# EAGLE board main (EAGLE 8.7.0)
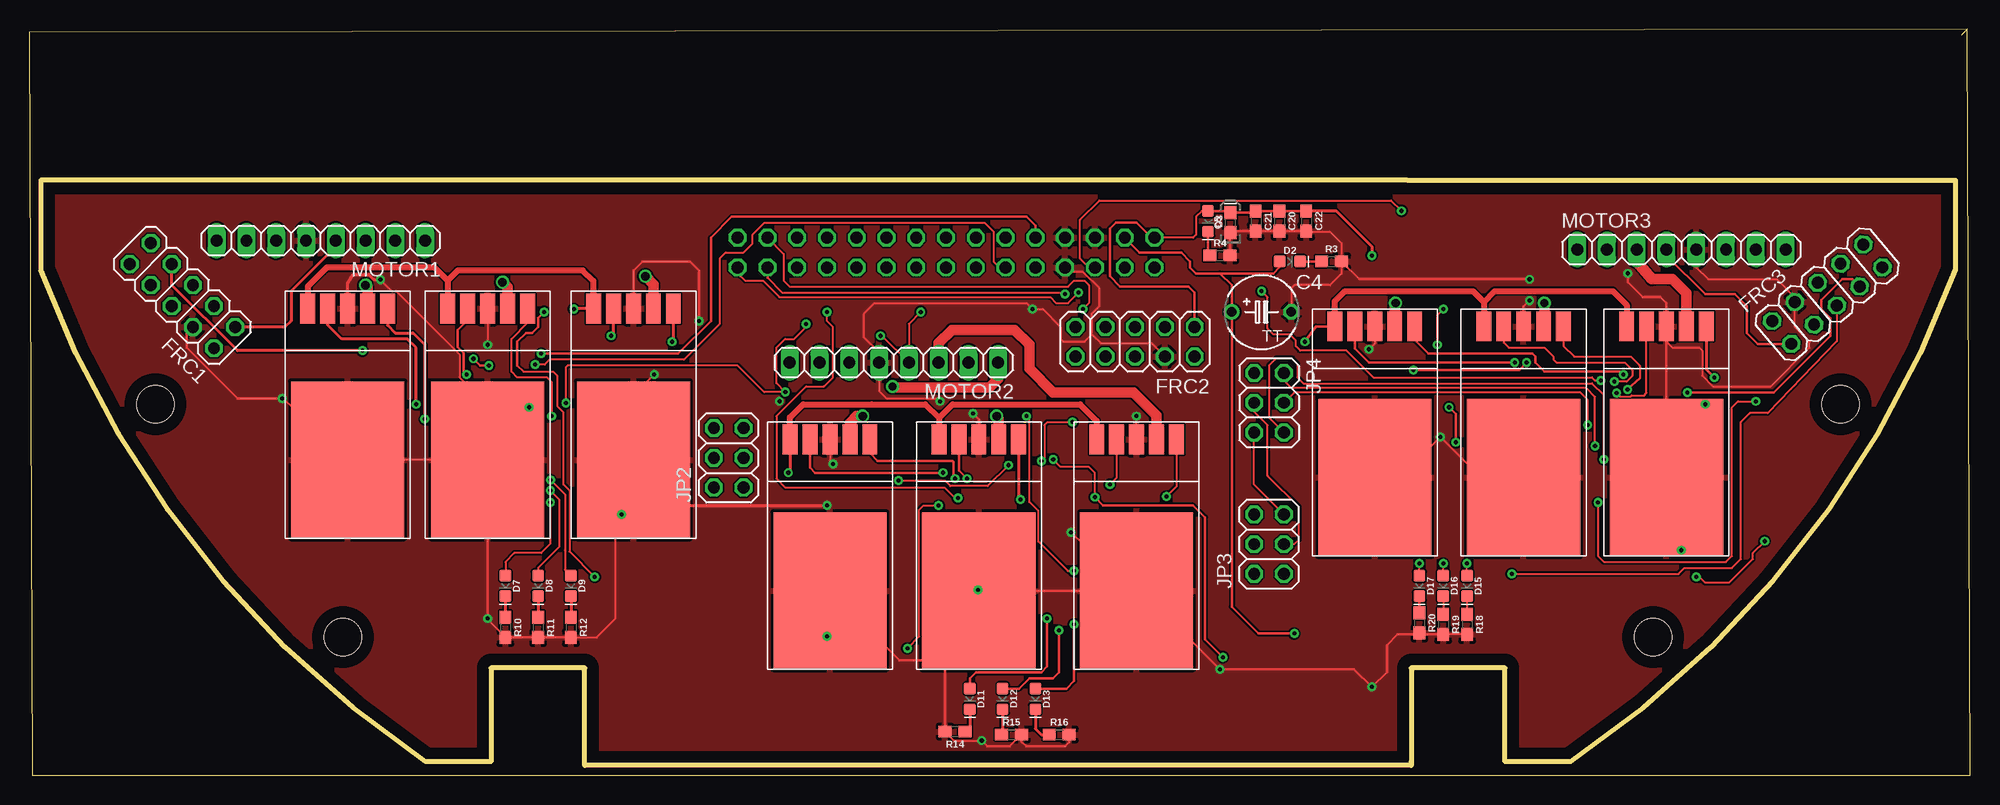
[diagram p0: board, top side]
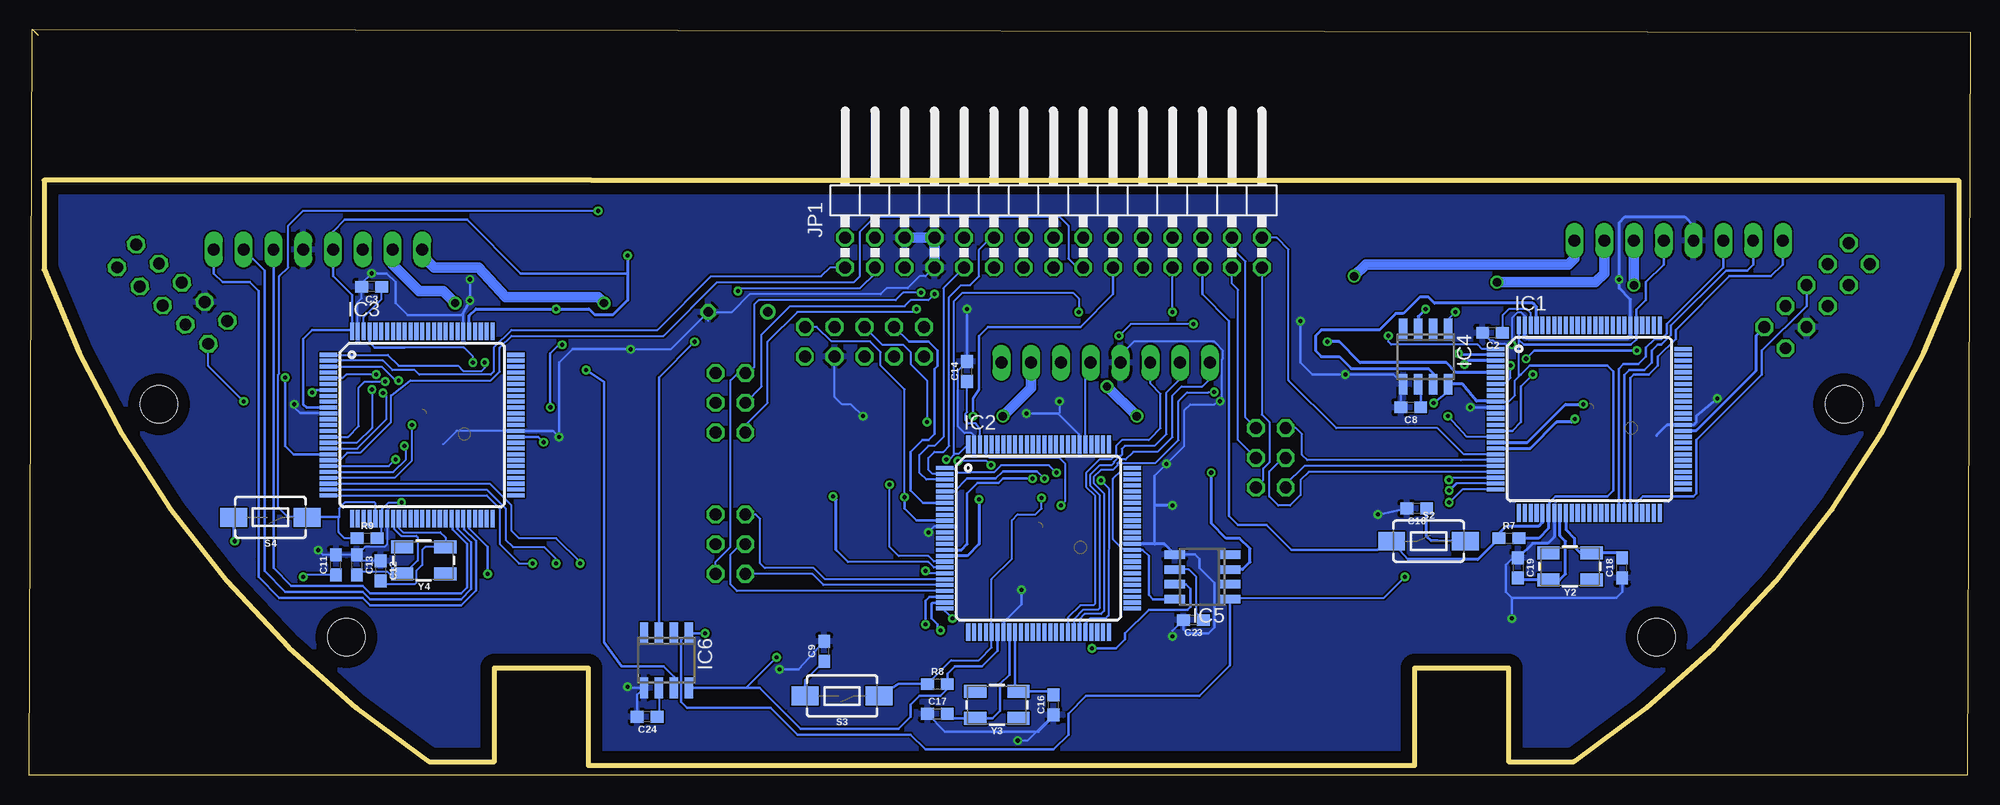
[diagram p1: board, bottom side, seen from below]

Size 165.59 x 63.68 mm. Coordinates in mm from the lower left corner, seen from the top.
Outline: 165.33,63.68 0,63.42 0.25,0 165.59,0 165.33,63.68
Outline: 117.91,0.85 117.91,9.17 125.91,9.17 125.91,1.17 131.49,1.17 arc36 164.32,43.17 164.32,50.79 117.66,50.79
Outline: 39.39,9.17 47.39,9.17 47.39,0.85 117.91,0.85
Outline: 39.39,1.17 33.82,1.17 arc-36 0.99,43.17 0.99,50.79 117.58,50.79
Outline: 117.91,1.17 117.91,0.85
Outline: 39.39,9.17 39.39,1.17
Outline: 165.33,63.68 164.83,63.17
Copper layers (1*16): Top 0.035mm / dielectric 1.5mm / Bottom 0.035mm
Design rules "default": minimum track width 6mil, minimum drill 0.35mm, track to track 6mil, track to pad 6mil, pad to pad 6mil, via to via 6mil, smd to smd 6mil, copper to edge 40mil, drill to drill 6mil, minimum pad ring 10mil, minimum via ring 8mil, stop-mask expansion 4mil, vias tented up to drill 0mil, thermal gap 10mil
Holes 3.2 mm at 138.54,11.81 26.76,11.81 10.77,31.67 154.53,31.67

## Footprints (pad centres in the part's own frame; a part is rotated, then mirrored left to right if it is on the bottom)
0603 = smd 1.1 x 1: 1 -0.85,0; 2 0.85,0
TAP5-60 = drill 0.813: + -2.54,0 | drill 0.813 octagon: - 2.54,0
0603-POLAR = smd 1.1 x 1: + 0.85,0; - -0.85,0
LED-0603 = smd 1 x 1: A -0.877,0; C 0.877,0
2X05 = drill 1.016 octagon: 1 -5.08,-1.27; 2 -5.08,1.27; 3 -2.54,-1.27; 4 -2.54,1.27; 5 0,-1.27; 6 0,1.27; 7 2.54,-1.27; 8 2.54,1.27; 9 5.08,-1.27; 10 5.08,1.27
TQFP100 = smd 1.5 x 0.35: 1 -8,6; 2 -8,5.5; 3 -8,5; 4 -8,4.5; 5 -8,4; 6 -8,3.5; 7 -8,3; 8 -8,2.5; 9 -8,2; 10 -8,1.5; 11 -8,1; 12 -8,0.5; 13 -8,0; 14 -8,-0.5; 15 -8,-1; 16 -8,-1.5; 17 -8,-2; 18 -8,-2.5; 19 -8,-3; 20 -8,-3.5; 21 -8,-4; 22 -8,-4.5; 23 -8,-5; 24 -8,-5.5; 25 -8,-6; 51 8,-6; 52 8,-5.5; 53 8,-5; 54 8,-4.5; 55 8,-4; 56 8,-3.5; 57 8,-3; 58 8,-2.5; 59 8,-2; 60 8,-1.5; 61 8,-1; 62 8,-0.5; 63 8,0; 64 8,0.5; 65 8,1; 66 8,1.5; 67 8,2; 68 8,2.5; 69 8,3; 70 8,3.5; 71 8,4; 72 8,4.5; 73 8,5; 74 8,5.5; 75 8,6 | smd 0.35 x 1.5: 26 -6,-8; 27 -5.5,-8; 28 -5,-8; 29 -4.5,-8; 30 -4,-8; 31 -3.5,-8; 32 -3,-8; 33 -2.5,-8; 34 -2,-8; 35 -1.5,-8; 36 -1,-8; 37 -0.5,-8; 38 0,-8; 39 0.5,-8; 40 1,-8; 41 1.5,-8; 42 2,-8; 43 2.5,-8; 44 3,-8; 45 3.5,-8; 46 4,-8; 47 4.5,-8; 48 5,-8; 49 5.5,-8; 50 6,-8; 76 6,8; 77 5.5,8; 78 5,8; 79 4.5,8; 80 4,8; 81 3.5,8; 82 3,8; 83 2.5,8; 84 2,8; 85 1.5,8; 86 1,8; 87 0.5,8; 88 0,8; 89 -0.5,8; 90 -1,8; 91 -1.5,8; 92 -2,8; 93 -2.5,8; 94 -3,8; 95 -3.5,8; 96 -4,8; 97 -4.5,8; 98 -5,8; 99 -5.5,8; 100 -6,8
SO08 = smd 0.72 x 1.78: 1 -1.905,-2.35; 2 -0.635,-2.35; 3 0.635,-2.35; 4 1.905,-2.35; 5 1.905,2.35; 6 0.635,2.35; 7 -0.635,2.35; 8 -1.905,2.35
2X15/90 = drill 1.016 octagon: 1 -17.78,-6.35; 2 -17.78,-3.81; 3 -15.24,-6.35; 4 -15.24,-3.81; 5 -12.7,-6.35; 6 -12.7,-3.81; 7 -10.16,-6.35; 8 -10.16,-3.81; 9 -7.62,-6.35; 10 -7.62,-3.81; 11 -5.08,-6.35; 12 -5.08,-3.81; 13 -2.54,-6.35; 14 -2.54,-3.81; 15 0,-6.35; 16 0,-3.81; 17 2.54,-6.35; 18 2.54,-3.81; 19 5.08,-6.35; 20 5.08,-3.81; 21 7.62,-6.35; 22 7.62,-3.81; 23 10.16,-6.35; 24 10.16,-3.81; 25 12.7,-6.35; 26 12.7,-3.81; 27 15.24,-6.35; 28 15.24,-3.81; 29 17.78,-6.35; 30 17.78,-3.81
2X03 = drill 1.016 octagon: 1 -2.54,-1.27; 2 -2.54,1.27; 3 0,-1.27; 4 0,1.27; 5 2.54,-1.27; 6 2.54,1.27
UC2950 = smd 1.27 x 2.54: P$1 1.93,3.607; P$2 3.632,3.607; P$3 5.334,3.607; P$4 7.036,3.607; P$5 8.738,3.607 | smd 9.652 x 13.386: P$6 5.334,-9.309
1X08 = drill 1.016 long: 1 -8.89,0; 2 -6.35,0; 3 -3.81,0; 4 -1.27,0; 5 1.27,0; 6 3.81,0; 7 6.35,0; 8 8.89,0
TACTILE_SWITCH_SMD_6.0X3.5MM = smd 2.3 x 1.6: 1 -3.15,0; 2 3.15,0
CRYSTAL-SMD-5X3.2-4PAD = smd 1.9 x 1.1: 1 -1.85,-1.15; 2 1.85,-1.15; 3 1.85,1.15; 4 -1.85,1.15

## Placement (x,y rotation side)
C2  0.1uF  [0603]  40.75,37.77 180 bottom
C3  0.1uF  [0603]  136.38,41.71 180 bottom
C4  47uF  [TAP5-60]  105.14,39.55 0 top
C5  10uF  [0603-POLAR]  102.47,47.17 90 top
C8  1nF  [0603]  47.73,31.42 180 bottom
C9  0.1uF  [0603]  97.77,10.59 90 bottom
C10  0.1uF  [0603]  47.22,22.78 180 bottom
C11  0.1uF  [0603]  139.43,17.96 90 bottom
C12  22pF  [0603]  135.62,17.45 270 bottom
C13  22pF  [0603]  137.65,17.96 270 bottom
C14  0.1uF  [0603]  85.58,34.47 90 bottom
C16  22pF  [0603]  78.21,6.02 90 bottom
C17  22pF  [0603]  88.12,5.26 0 bottom
C18  22pF  [0603]  29.7,17.7 90 bottom
C19  22pF  [0603]  38.59,17.7 270 bottom
C20  0.1uF  [0603]  106.66,47.3 270 top
C21  0.1uF  [0603]  104.63,47.3 270 top
C22  0.1uF  [0603]  108.95,47.3 270 top
C23  1nF  [0603]  66.27,13.26 180 bottom
C24  1nF  [0603]  112.88,5 180 bottom
D2  Yellow  [LED-0603]  107.55,43.87 0 top
D3  Yellow  [LED-0603]  100.56,47.3 270 top
D7  Yellow  [LED-0603]  40.62,16.18 270 top
D8  Yellow  [LED-0603]  43.41,16.18 270 top
D9  Yellow  [LED-0603]  46.21,16.18 270 top
D11  Yellow  [LED-0603]  80.24,6.53 270 top
D12  Yellow  [LED-0603]  83.04,6.53 270 top
D13  Yellow  [LED-0603]  85.83,6.53 270 top
D15  Yellow  [LED-0603]  122.66,16.18 270 top
D16  Yellow  [LED-0603]  120.63,16.18 270 top
D17  Yellow  [LED-0603]  118.6,16.18 270 top
FRC1  [2X05]  13.06,40.95 135 top
FRC2  [2X05]  94.34,37.01 180 top
FRC3  [2X05]  153.4,41.07 40 top
IC1  ATMEGA2560-16AU  [TQFP100]  32.49,30.4 0 bottom
IC2  ATMEGA2560-16AU  [TQFP100]  79.48,20.24 0 bottom
IC3  ATMEGA2560-16AU  [TQFP100]  132.06,29.9 0 bottom
IC4  ACS712  [SO08]  46.46,35.74 180 bottom
IC5  ACS712  [SO08]  65.51,16.94 90 bottom
IC6  ACS712  [SO08]  111.23,9.83 180 bottom
JP1  [2X15/90]  78.21,49.71 0 bottom
JP2  [2X03]  59.67,27.1 90 top
JP3  [2X03]  105.77,19.74 90 top
JP4  [2X03]  105.77,31.8 270 top
MIC1  [UC2950]  21.82,36.25 0 top
MIC2  [UC2950]  33.76,36.25 0 top
MIC3  [UC2950]  46.21,36.25 0 top
MIC4  [UC2950]  89.13,25.07 0 top
MIC5  [UC2950]  75.67,25.07 0 top
MIC6  [UC2950]  62.97,25.07 0 top
MIC7  [UC2950]  109.45,34.72 0 top
MIC8  [UC2950]  122.15,34.72 0 top
MIC9  [UC2950]  134.35,34.72 0 top
MOTOR1  [1X08]  24.87,45.64 180 top
MOTOR2  [1X08]  73.77,35.23 180 top
MOTOR3  [1X08]  140.95,44.88 0 top
R3  1k  [0603]  111.11,43.87 0 top
R4  1k  [0603]  101.58,44.37 0 top
R7  1k  [0603]  39.35,20.24 0 bottom
R8  1k  [0603]  88.12,7.8 0 bottom
R9  1k  [0603]  136.76,20.24 0 bottom
R10  1k  [0603]  40.62,12.62 270 top
R11  1k  [0603]  43.41,12.62 270 top
R12  1k  [0603]  46.21,12.62 270 top
R14  1k  [0603]  78.97,3.73 180 top
R15  1k  [0603]  83.8,3.48 0 top
R16  1k  [0603]  87.86,3.48 0 top
R18  1k  [0603]  122.66,12.88 270 top
R19  1k  [0603]  120.63,12.88 270 top
R20  1k  [0603]  118.6,13.01 270 top
S2  MOMENTARY-SWITCH-SPST-SMD-6.0X3.5MM  [TACTILE_SWITCH_SMD_6.0X3.5MM]  46.21,19.99 0 bottom
S3  MOMENTARY-SWITCH-SPST-SMD-6.0X3.5MM  [TACTILE_SWITCH_SMD_6.0X3.5MM]  96.25,6.78 180 bottom
S4  MOMENTARY-SWITCH-SPST-SMD-6.0X3.5MM  [TACTILE_SWITCH_SMD_6.0X3.5MM]  145.01,22.02 180 bottom
Y2  16MHz  [CRYSTAL-SMD-5X3.2-4PAD]  34.14,17.83 180 bottom
Y3  16MHz  [CRYSTAL-SMD-5X3.2-4PAD]  83.04,6.02 180 bottom
Y4  16MHz  [CRYSTAL-SMD-5X3.2-4PAD]  131.93,18.34 180 bottom

## Library data of the parts
C2 C3 C9-C11 C14 C20-C22 = SparkFun-Capacitors; PROD_ID: CAP-08604
C4 = rcl; SPICEPREFIX: C
C5 = SparkFun-Capacitors; PROD_ID: CAP-13210
C8 C23 C24 = SparkFun-Capacitors; PROD_ID: CAP-07886
C12 C13 C16-C19 = SparkFun-Capacitors; PROD_ID: CAP-07876
D2 D3 D7-D9 D11-D13 D15-D17 = SparkFun-LED; PROD_ID: DIO-09003
FRC1-FRC3 JP1-JP4 MOTOR1-MOTOR3 = pinhead
IC1-IC3 = atmel-2005
IC4-IC6 = ACS712
MIC1-MIC9 = uc2950
R3 R4 R7-R12 R14-R16 R18-R20 = SparkFun-Resistors; PROD_ID: RES-07856
S2-S4 = SparkFun-Switches; PROD_ID: SWCH-00815; SF_SKU: COM-08229
Y2-Y4 = SparkFun-Clocks; PROD_ID: XTAL-08218; SF_ID: COM-00094

## Nets
5V: C5.+ C20.1 C21.1 C22.1 D3.A FRC1.1 FRC2.1 FRC3.1 IC1.10 IC1.31 IC1.61 IC1.80 IC1.100 IC2.10 IC2.31 IC2.61 IC2.80 IC2.100 IC3.10 IC3.31 IC3.61 IC3.80 IC3.100 IC4.8 IC5.8 IC6.8 JP1.2 MOTOR1.4 MOTOR2.4 MOTOR3.4 R7.2 R8.2 R9.2
18V: C4.+ D2.A IC4.1 IC5.1 IC6.1 JP1.4
ACS1: IC4.3 MIC1.P$1 MIC2.P$1 MIC3.P$1
ACS2: IC5.3 MIC4.P$1 MIC5.P$1 MIC6.P$1
ACS3: IC6.3 MIC7.P$1 MIC8.P$1 MIC9.P$1
CHA1: FRC1.5 IC1.46
CHA2: FRC2.5 IC2.46
CHA3: FRC3.5 IC3.46
CHB1: FRC1.7 IC1.7
CHB2: FRC2.7 IC2.7
CHB3: FRC3.7 IC3.7
CLK: JP1.28 JP2.5 JP3.5 JP4.5
CLK1: IC1.20 JP2.6
CLK2: IC2.20 JP3.6
CLK3: IC3.20 JP4.6
CUR1: IC1.97 IC4.7
CUR2: IC2.97 IC5.7
CUR3: IC3.97 IC6.7
DEB11: D9.A IC1.23
DEB12: D13.A IC2.23
DEB13: D17.A IC3.23
DEB21: D8.A IC1.24
DEB22: D12.A IC2.24
DEB23: D16.A IC3.24
DEB31: D7.A IC1.25
DEB32: D11.A IC2.25
DEB33: D15.A IC3.25
GND: C2.2 C3.2 C4.- C5.- C8.2 C9.2 C10.2 C11.2 C12.1 C13.1 C14.2 C16.1 C17.1 C18.1 C19.1 C20.2 C21.2 C22.2 C23.2 C24.2 FRC1.4 FRC2.4 FRC3.4 IC1.11 IC1.32 IC1.62 IC1.81 IC1.99 IC2.11 IC2.32 IC2.62 IC2.81 IC2.99 IC3.11 IC3.32 IC3.62 IC3.81 IC3.99 IC4.5 IC5.5 IC6.5 JP1.6 JP1.7 JP1.8 MIC1.P$3 MIC1.P$6 MIC2.P$3 MIC2.P$6 MIC3.P$3 MIC3.P$6 MIC4.P$3 MIC4.P$6 MIC5.P$3 MIC5.P$6 MIC6.P$3 MIC6.P$6 MIC7.P$3 MIC7.P$6 MIC8.P$3 MIC8.P$6 MIC9.P$3 MIC9.P$6 MOTOR1.5 MOTOR2.5 MOTOR3.5 R3.2 R4.2 R10.2 R11.2 R12.2 R14.2 R15.2 R16.2 R18.2 R19.2 R20.2
H11: IC1.43 MOTOR1.6
H12: IC2.43 MOTOR2.6
H13: IC3.43 MOTOR3.6
H21: IC1.44 MOTOR1.7
H22: IC2.44 MOTOR2.7
H23: IC3.44 MOTOR3.7
H31: IC1.45 MOTOR1.8
H32: IC2.45 MOTOR2.8
H33: IC3.45 MOTOR3.8
M11: MIC3.P$4 MOTOR1.1
M12: MIC6.P$4 MOTOR2.1
M13: MIC7.P$4 MOTOR3.1
M21: MIC2.P$4 MOTOR1.2
M22: MIC5.P$4 MOTOR2.2
M23: MIC8.P$4 MOTOR3.2
M31: MIC1.P$4 MOTOR1.3
M32: MIC4.P$4 MOTOR2.3
M33: MIC9.P$4 MOTOR3.3
MISO: JP1.27 JP2.3 JP3.3 JP4.3
MISO1: IC1.22 JP2.4
MISO2: IC2.22 JP3.4
MISO3: IC3.22 JP4.4
MOSI: JP1.29 JP2.1 JP3.1 JP4.1
MOSI1: IC1.21 JP2.2
MOSI2: IC2.21 JP3.2
MOSI3: IC3.21 JP4.2
N$9: D2.C R3.1
N$11: C2.1 IC1.98
N$13: D3.C R4.1
N$22: C10.1 S2.2
N$24: C3.1 IC3.98
N$25: C11.1 S4.2
N$26: C14.1 IC2.98
N$28: C9.1 S3.2
N$29: C19.2 IC1.33 Y2.3
N$30: C17.2 IC2.33 Y3.3
N$31: C16.2 IC2.34 Y3.1
N$32: C18.2 IC1.34 Y2.1
N$33: C13.2 IC3.33 Y4.3
N$34: C12.2 IC3.34 Y4.1
N$41: C8.1 IC4.6
N$44: C23.1 IC5.6
N$47: C24.1 IC6.6
N$51: D7.C R10.1
N$52: D8.C R11.1
N$53: D9.C R12.1
N$56: D11.C R14.1
N$57: D12.C R15.1
N$58: D13.C R16.1
N$61: D15.C R18.1
N$62: D16.C R19.1
N$63: D17.C R20.1
RST1: IC1.30 JP1.25 R7.1 S2.1
RST2: IC2.30 JP1.23 R8.1 S3.1
RST3: IC3.30 JP1.5 R9.1 S4.1
RX1: IC1.2 JP1.10
RX2: IC2.2 JP1.12
RX3: IC3.2 JP1.1
S11: IC1.1 MIC3.P$2
S12: IC2.1 MIC6.P$2
S13: IC3.1 MIC7.P$2
S21: IC1.5 MIC3.P$5
S22: IC2.5 MIC6.P$5
S23: IC3.5 MIC7.P$5
S31: IC1.15 MIC2.P$2
S32: IC2.15 MIC5.P$2
S33: IC3.15 MIC8.P$2
S41: IC1.16 MIC2.P$5
S42: IC2.16 MIC5.P$5
S43: IC3.16 MIC8.P$5
S51: IC1.17 MIC1.P$2
S52: IC2.17 MIC4.P$2
S53: IC3.17 MIC9.P$2
S61: IC1.18 MIC1.P$5
S62: IC2.18 MIC4.P$5
S63: IC3.18 MIC9.P$5
SS1: IC1.19 JP1.30
SS2: IC2.19 JP1.19
SS3: IC3.19 JP1.17
TX1: IC1.3 JP1.11
TX2: IC2.3 JP1.9
TX3: IC3.3 JP1.3

## Tracks (layer width: path | path; a pad name or v marks a point on that pad's centre or on a via)
5V  (via drill 0.35)
  Top 0.152: v45.77,31.78 45.77,34.83 45.92,34.98 60.43,34.98 62.7,32.71 v64.5,32.71 63.73,33.48 63.73,36.5 64.5,37.26 65.26,37.26 66.27,38.28 v66.27,38.53 | v90.91,23.75 90.91,25.83 90.4,26.34 87.99,26.34 v87.36,26.98 | D3.A 100.04,48.17 99.55,47.68 99.55,46.15 99.29,45.9 JP1.2 | v72.62,37.52 72.75,37.52 MOTOR2.4 75.04,38.53 v76.05,39.55 | v133.84,23.29 133.84,18.72 134.35,18.21 144.76,18.21 145.27,18.72 145.27,31.42 145.78,31.93 v147.3,31.93
  Top 0.203: D3.A 102.31,48.17 C5.+ 104.5,48.02 C21.1 C20.1 C22.1 | MOTOR3.4 139.68,44.37 142.98,41.07 145.52,41.07 146.54,40.06 146.54,37.77 147.47,36.83 FRC3.1 | JP1.2 95.74,45.9 94.47,47.17 92.69,47.17 92.18,46.66 92.18,42.6 93.07,41.71 98.91,41.71 99.42,41.2 FRC2.1 | v121.71,28.44 121.71,30.85 v121.14,31.42 | v120.12,36.75 120.12,39.29 v120.63,39.8 | v101.83,10.08 100.31,11.61 100.31,22.02 99.29,23.04 91.62,23.04 v90.91,23.75
  Top 0.254: MOTOR1.4 26.14,45.14 22.33,41.33 22.33,38.79 21.8,38.25 FRC1.1 | C22.1 108.98,48.18 111.49,48.18 114.53,45.14 v114.53,44.37
  Bottom 0.152: IC2.61 71.58,19.34 72.33,19.34 73.13,20.15 73.13,25.32 72.46,26 72.46,26.51 72.33,26.65 69.52,26.65 67.54,28.63 67.54,31.95 66.81,32.69 65,32.69 64.98,32.71 v64.5,32.71 | IC4.8 44.56,32.74 v45.77,31.78 | R9.2 135.56,20.59 IC3.31 135.46,21.99 135.46,22.74 134.91,23.29 v133.84,23.29 | v66.27,38.53 71.61,38.53 v72.62,37.52 | 86.59,27.46 86.27,27.46 IC2.100 | v87.36,26.98 87.07,26.98 86.59,27.46 | FRC2.1 98.41,38.28 97.16,37.03 93.86,37.03 92.94,36.12 92.94,34.98 90.91,32.94 v90.91,23.75 | IC1.10 40.47,31.93 39.35,31.93 38.84,32.44 38.84,33.71 38.49,34.06 | 38.49,34.06 38.33,34.21 | 38.49,37.17 38.49,37.01 38.49,34.06 | v76.05,39.55 76.05,40.69 76.56,41.2 85.96,41.2 86.72,40.44 86.72,27.33 86.59,27.46 | v147.3,31.93 150.32,34.95 FRC3.1 | IC2.80 75.48,34.79 MOTOR2.4
  Bottom 0.203: MOTOR1.4 26.14,43.61 27.67,42.09 27.67,40.56 28.49,39.74 IC1.80 28.49,37.2 28.94,36.75 38.08,36.75 38.49,37.17 IC1.100 | IC5.8 69.7,15.04 70.08,15.42 70.08,18.72 70.61,19.24 IC2.61 | IC1.31 35.92,22.48 35.92,23.26 35.38,23.8 30.97,23.8 30.46,24.31 30.46,34.47 30.97,34.98 37.57,34.98 38.33,34.21 | IC2.31 82.98,10.65 84.31,9.32 86.59,9.32 87.27,8.65 R8.2 87.27,7.38 87.86,6.78 89.64,6.78 90.4,6.02 90.4,5 91.42,3.99 99.8,3.99 103.29,7.48 IC6.8 104.44,7.48 v101.83,10.08 | IC3.10 141.94,31.4 142.22,31.67 142.22,37.26 141.46,38.02 138.19,38.02 IC3.100 138.06,40.98 139.68,42.6 MOTOR3.4 139.68,46.41 138.66,47.42 128.25,47.42 123.68,42.85 114.53,42.85 | IC2.10 87.51,21.77 89.9,21.77 90.91,22.78 v90.91,23.75 | IC3.61 122.17,28.9 v121.71,28.44 | v121.14,31.42 121.14,35.99 120.38,36.75 v120.12,36.75
  Bottom 0.254: IC1.31 35.99,21.06 36.81,20.24 R7.2 | IC1.10 40.54,31.95 42.12,31.95 43.3,33.39 IC4.8 | FRC1.1 18.27,37.53 18.27,34.55 23.37,29.45 24.45,29.45 IC1.61 | IC3.80 128.06,39.23 127.49,39.8 v120.63,39.8 117.84,39.8 117.33,39.29 115.8,39.29 114.53,40.56 114.53,42.85 v114.53,44.37
18V  (via drill 0.35)
  Top 0.152: 41.64,34.98 42.16,34.45 43.41,34.45 43.42,34.47 44.68,34.47 45.06,34.09 45.06,31.5 45.57,30.99 45.57,24.82 46.08,24.31 46.08,19.1 v48.24,16.94
  Top 0.203: 41.64,34.98 41.64,37.01 42.4,37.77 42.91,37.77 43.41,38.28 43.41,39.04 v43.92,39.55 | JP1.4 94.72,44.63 98.28,44.63 99.04,43.87 99.04,43.36 99.55,42.85 101.58,42.85 | 101.58,42.85 106.15,42.85 106.67,43.37 D2.A | 101.58,42.85 102.6,41.83 C4.+ 102.6,14.4 104.88,12.12 v107.93,12.12
  Bottom 0.152: IC5.1 63.03,15.16 50.02,15.16 v48.24,16.94
  Bottom 0.203: IC4.1 44.56,38.91 v43.92,39.55 | v107.93,12.12 109.26,12.12 IC6.1 109.96,11.54 109.96,6.27 109.45,5.77 102.34,5.77 100.06,3.48 90.4,3.48 89.13,2.21 78.21,2.21 76.94,3.48 76.94,5.26 75.42,6.78 65.77,6.78 63.16,9.39 IC5.1
ACS1  (via drill 0.35)
  Top 0.254: MIC3.P$1 46.51,39.85 v46.46,39.8
  Top 0.508: MIC3.P$1 48.14,42.19 47.22,43.1 36.56,43.1 35.69,42.24 | 35.69,42.24 MIC2.P$1 | 35.69,42.24 34.57,43.36 25.38,43.36 23.75,41.73 MIC1.P$1
  Bottom 0.254: v46.46,39.8 47.1,39.17 IC4.3
ACS2  (via drill 0.35)
  Top 0.254: MIC6.P$1 64.9,25.98 v64.75,25.83
  Top 0.508: MIC6.P$1 64.9,30.56 66.02,31.67 71.86,31.67 76.43,31.67 77.6,30.51 | 77.6,30.51 MIC5.P$1 | 77.6,30.51 78.77,31.67 89.64,31.67 91.06,30.25 MIC4.P$1
  Bottom 0.254: IC5.3 62.08,17.58 61.45,18.21 61.45,19.36 62.34,20.24 63.48,20.24 64.75,21.51 v64.75,25.83
ACS3  (via drill 0.35)
  Top 0.203: v108.82,37.01 109.76,38.33 MIC7.P$1
  Top 0.508: MIC7.P$1 111.38,40.46 112.25,41.33 123.17,41.33 124.08,40.41 | 124.08,40.41 MIC8.P$1 | 124.08,40.41 125,41.33 135.11,41.33 136.28,40.16 MIC9.P$1
  Bottom 0.203: IC6.3 111.87,33.96 v108.82,37.01
CHA1
  Bottom 0.203: IC1.46 28.49,23.23 27.92,23.8 23.6,23.8 23.35,24.05 23.35,28.63 17.76,34.21 17.76,36.25 13.96,40.05 FRC1.5 | FRC1.5
CHA2  (via drill 0.35)
  Top 0.152: v74.15,25.17 78.11,25.17 78.59,24.69 81.77,24.69 v83.55,26.47 | v89,30.15 86.85,30.15 86.59,29.9 86.59,27.1 v86.34,26.85
  Bottom 0.152: FRC2.5 92.82,36.75 91.04,36.75 90.4,36.12 90.4,35.1 89.01,33.71 v89,30.15 | v86.34,26.85 83.92,26.85 v83.55,26.47 | v74.15,25.17 73.48,24.51 73.48,24.44 73.51,14.15 73.51,13.64 73.77,13.39 75.09,13.39 75.48,12.99 IC2.46
CHA3  (via drill 0.35)
  Top 0.152: FRC3.5 154.21,37.06 148.32,30.91 146.79,30.91 146.03,30.15 146.03,18.47 145.27,17.7 141.2,17.7 140.7,17.2 v126.47,17.2
  Bottom 0.203: IC3.46 128.06,21.07 126.47,19.48 v126.47,17.2
CHB1  (via drill 0.35)
  Top 0.203: v37.88,35.56 38.47,34.98 v39.21,34.98
  Top 0.254: v28.43,36.25 17.76,36.25 12.16,41.84 FRC1.7
  Bottom 0.152: IC1.7 40.4,33.5 39.65,33.5 39.21,33.94 v39.21,34.98
  Bottom 0.203: v28.43,36.25 37.2,36.25 v37.88,35.56
CHB2
  Bottom 0.203: IC2.7 89.34,23.24 90.4,24.31 90.4,27.61 89.39,28.63 88.88,28.63 88.37,29.13 88.37,34.68 88.12,34.94 88.12,36.25 88.88,37.01 90.53,37.01 FRC2.7
CHB3  (via drill 0.35)
  Top 0.203: FRC3.7 155.55,42.34 154.67,42.34 152.89,40.56 152.89,39.8 153.65,39.04 153.65,37.52 148.82,32.69 v141.46,32.69
  Bottom 0.203: IC3.7 141.25,32.9 v141.46,32.69
CLK  (via drill 0.35)
  Top 0.152: JP3.5 104.5,24.82 JP4.5 | JP1.28 64.37,44.5 64.37,42.22 64.88,41.71 88.63,41.71 89.13,42.22 90.02,42.22 90.4,41.83 90.4,40.31 v89.9,39.8
  Bottom 0.152: JP2.5 61.83,30.53 61.83,43.87 62.97,45.01 JP1.28 | JP4.5 104.5,29.9 102.6,31.8 102.6,37.01 100.06,39.55 90.15,39.55 v89.9,39.8
CLK1
  Bottom 0.152: IC1.20 43.41,26.9 43.47,26.9 56.55,26.9 57,27.36 57,29.13 57.51,29.64 JP2.6
CLK2
  Bottom 0.152: JP3.6 103.61,22.28 103.23,21.9 103.23,18.09 102.85,17.7 98.66,17.7 97.7,16.74 IC2.20
CLK3  (via drill 0.35)
  Top 0.152: v134.32,26.98 134.32,32.46 133.33,33.45 108.69,33.45 108.18,33.96 108.18,35.1 107.68,35.61 106.41,35.61 105.77,34.98 105.77,30.53 JP4.6
  Bottom 0.152: IC3.20 134.92,26.4 134.35,26.98 v134.32,26.98
CUR1
  Bottom 0.254: IC1.97 36.99,39.98 37.32,40.31 45.7,40.31 46.21,40.82 46.97,40.82 48.37,39.42 49,39.42 50.4,38.02 55.35,38.02 55.86,37.52 55.86,36.25 55.35,35.74 53.83,35.74 52.81,34.72 46.21,34.72 45.83,34.34 IC4.7
CUR2  (via drill 0.35)
  Top 0.152: v74.91,10.85 75.93,11.86 75.93,22.66 76.31,23.04 v77.58,23.04
  Bottom 0.152: IC2.97 83.98,27.41 83.67,27.1 77.7,27.1 77.2,26.59 77.2,23.42 v77.58,23.04
  Bottom 0.203: IC5.7 66.91,16.31 66.53,15.93 66.53,14.4 66.78,14.15 70.08,14.15 72.12,12.12 72.12,11.61 72.88,10.85 v74.91,10.85
CUR3  (via drill 0.35)
  Top 0.203: v118.09,34.6 127.11,34.6 v127.74,35.23
  Bottom 0.152: v127.74,35.23 127.74,35.74 128.5,36.5 133.58,36.5
  Bottom 0.203: IC6.7 110.6,8.43 111.49,9.32 115.04,9.32 116.57,11.35 116.57,33.58 v118.09,34.6 | IC3.97 136.56,36.94 136.12,36.5 133.58,36.5
DEB11  (via drill 0.35)
  Top 0.152: v44.47,25.22 45.7,23.99 45.7,19.23 45.7,17.57 D9.A
  Bottom 0.152: IC1.23 44.29,25.4
  Bottom 0.254: 44.29,25.4 v44.47,25.22
DEB12  (via drill 0.35)
  Top 0.203: D13.A 88.49,7.41 89.13,8.05 89.13,12.86 v89.11,12.88
  Bottom 0.203: IC2.23 88.8,15.24 89.13,14.91 89.11,14.89 v89.11,12.88
DEB13  (via drill 0.35)
  Top 0.152: D17.A v118.6,18.09
  Bottom 0.152: v118.6,18.09 118.6,18.21 120.63,20.24 123.81,20.24 124.44,20.88 124.44,23.03 125.04,23.63 125.04,23.64 126.3,24.9 IC3.23
DEB21  (via drill 0.35)
  Top 0.152: v44.45,24.31 45.19,23.57 45.19,19.48 43.41,17.7 D8.A
  Bottom 0.152: IC1.24 43.86,24.9
  Bottom 0.254: 43.86,24.9 v44.45,24.31
DEB22  (via drill 0.35)
  Top 0.203: v87.84,12.37 87.84,8.79 87.36,8.31 85.32,8.31 84.42,7.41 D12.A
  Bottom 0.203: IC2.24 88.54,14.74 88.63,14.66 88.63,13.39 88.12,12.88 88.12,12.65 v87.84,12.37
DEB23  (via drill 0.35)
  Top 0.152: D16.A v120.63,18.09
  Bottom 0.152: v120.63,18.09 120.63,18.47 121.65,19.48 124.31,19.48 124.95,20.12 124.95,22.78 126.56,24.4 IC3.24
DEB31  (via drill 0.35)
  Top 0.152: v44.45,23.29 44.45,19.76 43.67,18.97 41.38,18.97 40.62,18.21 D7.A
  Bottom 0.152: IC1.25 43.34,24.4 v44.45,23.29
DEB32  (via drill 0.35)
  Top 0.203: D11.A 80.24,8.31 80.75,8.81 86.34,8.81 86.83,9.3 v86.83,13.39
  Bottom 0.203: IC2.25 87.48,14.04 v86.83,13.39
DEB33  (via drill 0.35)
  Top 0.152: D15.A v122.66,18.09
  Bottom 0.152: v122.66,18.09 123.81,18.09 125.46,19.74 125.46,22.78 126.57,23.9 IC3.25
GND  (via drill 0.35)
  Top 0.152: MIC7.P$3 114.79,36.88 v114.28,36.37 | C4.- 107.68,41.58 107.93,41.83 110.98,41.83 111.95,42.81 R3.2 111.95,45.43 110.98,46.41 108.98,46.41 C22.2 | MIC4.P$3 v94.47,30.66 | R18.2 R19.2 | MOTOR3.5 142.22,43.36 143.24,42.34 149.08,42.34 150.63,40.79 FRC3.4 150.63,38.25 151.87,37.01 151.87,36.5 148.57,33.2 143.65,33.2 142.73,34.12 142.73,36.25 142.47,36.5 140.19,36.5 139.68,37.01 MIC9.P$3 | MIC2.P$6 MIC1.P$6 | MIC2.P$3 v39.1,36.75 | 39.6,26.94 39.1,27.45 39.1,29.64 39.1,33.2 37.48,33.2 36.71,33.96 36.71,35.93 31.29,41.35 30.92,41.35 v29.95,42.32 | v77.7,31.93 77.45,32.18 73.13,32.18 72.5,32.82 MOTOR2.5 72.5,36.12 71.23,37.39 71.23,39.42 72.12,40.31 85.07,40.31 v85.58,39.8 86.47,39.8 87.99,38.28 87.99,37.26 88.25,37.01 90.02,37.01 90.66,37.64 | MIC6.P$3 68.31,26.85 v68.56,26.59 | R12.2 48.41,11.77 50.02,13.39 50.02,21.77 v50.53,22.28 | R14.2 78.89,2.97 v81.26,2.97 | 90.66,37.64 90.66,39.42 91.29,40.06 91.29,41.58 89.89,42.98 88.75,42.98 JP1.7 | 90.66,37.64 91.42,36.88 95.74,36.88 FRC2.4
  Top 0.203: MIC1.P$6 21.66,32.18 v21.57,32.18 17.76,32.18 13.44,36.5 13.44,37.73 FRC1.4 | 89.9,15.76 MIC4.P$6 94.89,15.76 v101.58,9.07 113.01,9.07 v114.53,7.54 115.8,8.81 115.8,11.1 116.73,12.03 118.73,12.03 | MIC5.P$6 v80.92,15.84 | MIC2.P$6 39.6,26.94 39.86,26.94 39.1,26.18 v39.1,13.39 39.1,13.3 R10.2 R11.2 R12.2 | v53.32,34.21 51.54,32.44 MIC3.P$6 50.53,26.94 v50.53,22.28 | R16.2 88.71,2.81 88.37,2.46 85.07,2.46 84.65,2.88 R15.2 83.63,2.46 81.77,2.46 v81.26,2.97 | R14.2 78.12,9.83 | 78.12,9.83 78.12,12.88 MIC5.P$6 | C22.2 C20.2 C21.2 102.6,46.45 C5.- 102.43,46.28 R4.2 | v80.5,30.89 81.01,30.38 MIC5.P$3 | R20.2 118.73,12.03 | 118.73,12.03 R19.2 | MIC3.P$3 51.54,43.1 52.3,43.87 56.37,43.87 57.13,43.1 v57.13,38.79 | v42.65,31.42 40.87,29.64 39.1,29.64 | v68.05,11.86 68.05,15.51 MIC6.P$6 74.24,9.83 78.12,9.83 | MIC7.P$6 116.91,25.41 v120.38,28.88 123.84,25.41 MIC8.P$6 | v140.95,19.23 140.95,24.14 MIC9.P$6 140.65,26.38 | v142.98,31.67 142.98,28.72 140.65,26.38 | 140.65,26.38 139.68,27.36 MIC9.P$3 139.68,40.31 139.17,40.82 137.65,40.82 136.38,42.09 v136.38,42.85 | MIC8.P$3 127.49,40.03 v128,40.54 | 89.9,15.76 MIC5.P$6 | v88.88,20.75 89.9,19.74 89.9,15.76 | R3.2 113.48,42.34 v128,42.34
  Top 0.254: v29.95,42.32 29.38,42.32 28.95,42.75 27.65,42.75 27.16,42 MIC1.P$3 | MIC3.P$6 55.44,23.04 v68.05,23.04
  Bottom 0.152: v114.28,36.37 110.85,36.37 C4.- | 107.68,38.79 C4.- | v94.47,30.66 95.48,31.67 96.25,31.67 96.88,32.31 FRC2.4 | IC3.99 137.56,40.4 137.23,40.73 C3.2 | C13.1 137.73,18.81 137.79,18.74 137.35,18.3 C12.1 | C13.1 136.94,19.52 135.26,19.52 135.06,19.72 IC3.32 | C2.2 40.94,37.11 40.7,37.11 40.39,36.81 39.65,36.81 39.59,36.75 v39.1,36.75 39.1,39.05 38.65,39.5 38.28,39.5 37.99,39.21 IC1.99 | v68.56,26.59 67.04,28.12 67.04,31.17 66.53,31.67 64.5,31.67 63.99,32.18 | 63.99,32.18 63.83,32.34 63.83,35.48 63.73,35.58 63.73,36.25 64.49,37.01 71.35,37.01 72.5,35.87 MOTOR2.5 | v63.99,31.93 v63.99,31.94 63.99,32.18 | IC2.11 88.39,21.24 v88.88,20.75 | IC2.99 84.98,28.99 85.21,29.22 85.79,29.22 86.34,29.77 86.34,34.56 C14.2 | C16.1 80.41,2.97 v81.26,2.97 | C4.- 105.64,39.55 104.12,41.07 92.94,41.07 92.44,41.58 90.66,41.58 89.64,42.6 89.13,42.6 JP1.7 | IC3.62 129.13,29.4 130.28,28.25 | C13.1 C11.2 140.53,18.81 v140.95,19.23 | v77.7,31.93 77.7,30.91 77.79,30.83
  Bottom 0.203: v21.57,32.18 23.35,30.66 23.35,30.15 23.59,29.9 IC1.62 | IC5.5 66.15,18.85 65.77,18.47 65.77,17.7 64.5,16.43 64.5,12.62 65,12.12 66.78,12.12 67.12,12.46 C23.2 68.05,12.33 v68.05,11.86 | C18.1 29.7,15.67 30.21,15.16 39.1,15.16 | 39.1,15.16 39.6,15.67 39.6,17.96 39.01,18.55 C19.1 | 39.1,15.16 v39.1,13.39 | C17.1 87.44,3.73 79.48,3.73 78.21,5 C16.1 | v80.5,30.89 77.84,30.89 77.79,30.83 76.05,29.1 76.05,28.32 IC2.81 | C8.2 48.58,33.17 IC4.5 49.19,34.21 v53.32,34.21 56.11,34.21 57.13,35.23 v57.13,38.79 | IC2.32 82.41,12.31 82.41,13.1 80.92,14.59 v80.92,15.84 | C9.2 99.97,9.07 v101.58,9.07 | C24.2 113.73,6.88 IC6.5 114.47,7.48 v114.53,7.54 | IC1.11 42.64,31.4 v42.65,31.42 | C10.2 50.36,22.28 v50.53,22.28 | IC3.62 120.89,29.4 v120.38,28.88 120.38,35.23 119.24,36.37 v114.28,36.37 | IC3.11 140.08,30.91 142.47,30.91 142.98,31.42 v142.98,31.67 | C3.2 137.23,42 v136.38,42.85 135.11,42.85 134.35,42.09 134.35,40.31 133.33,39.29 128.73,39.29 128.56,39.47 | 128.56,39.47 v128,40.54 v128,42.34 | 128.56,39.47 IC3.81 | C14.2 v85.58,39.8 | v68.56,26.59 69.58,25.58 69.58,23.04 69.58,19.74
  Bottom 0.254: IC1.32 35.49,20.37 36.05,19.81 37.33,19.81 C19.1 | MOTOR1.5 23.6,46.91 24.36,47.68 29.44,47.68 29.95,47.17 v29.95,42.32 29.95,41.58 28.99,40.62 IC1.81 28.99,37.46 29.19,37.26 37.83,37.26 37.99,37.43 IC1.99 | IC5.5 68.76,19.74 69.58,19.74 IC2.62 | v68.05,23.04 69.58,23.04 | IC1.62 25.88,29.9 26.78,29.01
  Bottom 0.889: JP1.6 JP1.8 JP1.7
  pour Top: 1,50.72 164.32,50.72 164.32,43.1 arc-36 131.55,1.19 125.96,1.19 125.96,9.07 117.84,9.07 117.84,0.94 47.48,0.94 47.48,9.07 39.35,9.07 39.35,1.19 33.76,1.19 arc-36 1,43.1
  pour Bottom: 1,50.72 164.32,50.72 164.32,43.1 arc-36 131.55,1.19 125.96,1.19 125.96,9.07 117.84,9.07 117.84,0.94 47.48,0.94 47.48,9.07 39.35,9.07 39.35,1.19 33.76,1.19 arc-36 1,43.1
H11
  Bottom 0.203: IC1.43 29.99,34.68 29.57,35.1 28.3,35.1 27.67,35.74 27.67,36.5 26.9,37.26 26.35,37.26 25.89,37.72 25.89,38.53 21.06,43.36 MOTOR1.6
H12
  Bottom 0.152: MOTOR2.6 69.96,33.45 69.07,32.56 69.07,29.64 69.96,28.75 70.08,28.63 72.37,28.63 72.88,28.12 72.88,27.39 73.29,26.98 74.28,26.98 75.42,25.83 75.42,24.64 74.66,23.88 74.66,14.66 74.78,14.53 75.93,14.53 76.98,13.47 IC2.43
H13
  Bottom 0.203: IC3.43 129.49,21.83 129.49,20.98 128.25,19.74 128.25,16.05 128.76,15.54 136.5,15.54 137.14,16.18 143.24,16.18 144.76,17.7 MOTOR3.6
H21
  Bottom 0.203: IC1.44 29.49,34.17 29.06,34.59 27.79,34.59 27.16,35.23 27.16,36.25 26.65,36.75 26.36,36.75 25.53,37.58 25.53,38.38 20.81,43.1 19.03,43.1 18.52,43.61 MOTOR1.7
H22
  Bottom 0.152: MOTOR2.7 67.42,33.83 68.56,32.69 68.56,29.13 69.58,28.12 72.12,28.12 72.37,27.86 72.37,27.36 72.47,27.26 72.58,27.26 73.07,26.77 73.07,26.66 73.26,26.47 74.28,26.47 75.09,25.66 75.09,25.58 75.09,24.74 74.28,23.93 74.28,14.28 74.4,14.15 75.67,14.15 76.48,13.34 IC2.44
H23
  Bottom 0.203: MOTOR3.7 145.52,43.1 145.52,18.21 145.52,17.96 145.52,17.45 143.74,15.67 137.14,15.67 136.5,15.04 128.76,15.04 127.89,15.9 127.89,19.89 129.06,21.05 IC3.44
H31
  Bottom 0.203: MOTOR1.8 15.98,43.61 17,42.6 20.55,42.6 25.13,38.02 25.13,37.26 26.65,35.74 26.65,34.98 27.41,34.21 28.68,34.21 28.99,33.9 IC1.45
H32
  Bottom 0.152: MOTOR2.8 64.88,33.83 65.51,33.2 67.29,33.2 68.05,32.44 68.05,28.88 69.32,27.61 71.4,27.61 72.06,26.95 72.45,26.95 72.77,26.64 72.77,26.45 73.13,26.09 74.15,26.09 74.78,25.45 74.78,24.94 73.89,24.05 73.89,14.02 74.15,13.77 75.55,13.77 75.98,13.33 IC2.45
H33
  Bottom 0.203: IC3.45 128.49,21.83 128.49,21 127.49,20 127.49,15.8 128.76,14.53 136.5,14.53 137.14,15.16 144.25,15.16 146.03,16.94 146.03,18.47 146.03,41.33 146.79,42.09 149.08,42.09 149.84,42.85 MOTOR3.8
M11  (via drill 0.7 pad 1.1)
  Top 0.889: MIC3.P$4 53.24,41.91 v52.56,42.6
  Bottom 0.889: MOTOR1.1 33.76,44.12 34.27,43.61 51.54,43.61 v52.56,42.6
M12  (via drill 0.7 pad 1.05, 0.7 pad 1.1)
  Top 0.889: MIC6.P$4 70.01,30.07 70.59,30.66 v71.1,30.66 | MOTOR2.1 82.66,33.83 81.93,33.11 73.98,33.11 v73.64,33.2
  Bottom 0.889: v71.1,30.66 v73.64,33.2
M13  (via drill 0.7 pad 1.1)
  Top 0.889: MIC7.P$4 116.49,40.23 v116.57,40.31
  Bottom 0.889: MOTOR3.1 132.06,44.37 131.04,43.36 127.23,43.36 124.95,40.82 117.07,40.82 v116.57,40.31
M21  (via drill 0.7 pad 1.1)
  Top 0.889: MIC2.P$4 40.8,41.66 v40.37,42.09
  Bottom 0.889: v40.37,42.09 31.98,42.09 31.22,42.85 MOTOR1.2
M22  (via drill 0.7 pad 1.1)
  Top 0.889: MIC5.P$4 82.71,30.48 v82.53,30.66
  Bottom 0.889: v82.53,30.66 80.12,33.07 MOTOR2.2
M23  (via drill 0.7 pad 1.1)
  Top 0.508: MIC8.P$4 129.27,38.41
  Top 0.889: 129.27,38.41 v129.27,40.31
  Bottom 0.889: v129.27,40.31 130.28,41.33 132.31,41.33 134.6,43.61 MOTOR3.2
M31  (via drill 0.7 pad 1.1)
  Top 0.889: MIC1.P$4 28.86,41.66 v28.68,41.83
  Bottom 0.889: v28.68,41.83 MOTOR1.3
M32
  Top 0.889: MIC4.P$4 96.17,30.73 94.21,32.69 87.36,32.69 85.32,34.72 85.32,36.75 84.05,38.02 78.72,38.02 77.58,36.88 MOTOR2.3
M33
  Top 0.889: MIC9.P$4 141.38,41.15 140.19,42.34 138.41,42.34 137.14,43.87 MOTOR3.3
MISO  (via drill 0.35)
  Top 0.152: JP3.3 107.93,19.74 108.31,20.12 108.31,22.91 105.64,25.58 105.64,29.9 104.5,31.04 JP4.3 | JP1.27 62.97,42.47 64.24,41.2 88.25,41.2 v88.37,41.07
  Bottom 0.152: JP2.3 62.46,28.63 62.46,41.45 62.97,41.96 JP1.27 | JP4.3 103.1,33.2 103.1,37.64 100.69,40.06 90.91,40.06 90.4,40.56 88.88,40.56 v88.37,41.07
MISO1
  Bottom 0.152: JP2.4 58.65,27.1 59.8,25.96 59.8,23.8 59.03,23.04 58.02,23.04 57.13,23.93 57.13,25.2 56.42,25.9 IC1.22
MISO2
  Bottom 0.152: IC2.22 105.21,15.74 105.77,16.31 105.77,18.85 104.88,19.74 JP3.4
MISO3  (via drill 0.35)
  Top 0.152: v132.95,29.9 132.95,32.05 132.31,32.69 107.93,32.69 JP4.4
  Bottom 0.152: IC3.22 134.4,25.4 132.95,26.85 v132.95,29.9
MOSI  (via drill 0.35)
  Top 0.152: JP1.29 60.43,42.85 61.07,42.22 62.59,42.22 63.99,40.82 87.1,40.82 87.61,40.31 88.63,40.31 v89.52,41.2
  Bottom 0.152: JP3.1 107.04,18.21 105.77,19.48 105.77,33.71 105.14,34.34 JP4.1 104.25,34.34 103.74,34.85 103.74,40.18 103.36,40.56 91.67,40.56 91.04,41.2 v89.52,41.2 | JP2.1 60.3,25.2 60.3,26.21 59.8,26.72 59.8,30.15 60.43,30.79 JP1.29
MOSI1
  Bottom 0.152: IC1.21 56.81,26.4 58.4,24.82 JP2.2
MOSI2
  Bottom 0.152: IC2.21 97.83,16.24 98.79,17.2 JP3.2
MOSI3  (via drill 0.35)
  Top 0.152: v133.58,28.12 133.58,32.31 132.82,33.07 107.68,33.07 107.04,33.71 JP4.2
  Bottom 0.152: IC3.21 134.54,25.9 133.46,26.98 133.46,27.99 v133.58,28.12
N$9
  Top 0.203: D2.C R3.1
N$11
  Bottom 0.152: IC1.98 37.49,39.47 37.83,39.8 39.35,39.8 39.9,39.26 C2.1
N$13
  Top 0.203: D3.C 100.56,44.54 R4.1
N$22
  Bottom 0.254: S2.2 45.45,20.02 | 45.45,20.02 45.7,20.03 45.72,20.03 | 45.45,20.02 45.99,20.02 46.37,20.41 C10.1
N$24
  Bottom 0.152: IC3.98 137.06,39.12 135.53,40.65 C3.1
N$25  (via drill 0.35)
  Top 0.152: v148.06,19.99 147.05,18.97 147.05,18.47 145.01,16.43 142.98,16.43 142.47,16.94 v142.22,16.94
  Bottom 0.152: C11.1 139.47,17.15 | 139.47,17.15 139.51,17.2 | v148.06,19.99 148.16,20.09 S4.2 | v142.22,16.94 142.01,17.15 139.47,17.15
N$26
  Bottom 0.152: IC2.98 84.48,29.56 84.82,30.02 85.45,30.02 85.7,30.28 85.7,30.88 85.58,31.01 C14.1
N$28
  Bottom 0.203: S3.2 99.4,8.12 C9.1
N$29
  Bottom 0.254: IC1.33 34.99,20.46 34.52,19.99 34.52,17.2 35.04,16.68 Y2.3 38.41,16.68 C19.2
N$30
  Bottom 0.203: C17.2 86.88,4.87 Y3.3 83.43,4.87 82.78,5.51 82.78,7.8 81.98,8.6 IC2.33
N$31
  Bottom 0.203: IC2.34 81.48,7.46 Y3.1 78.51,7.17 C16.2
N$32
  Bottom 0.254: IC1.34 34.49,20.97 33.76,20.24 33.76,19.48 33.25,18.97 33.25,18.98 Y2.1 30.12,18.98 C18.2
N$33
  Bottom 0.152: C13.2 137.43,17.11 137.16,17.38 135.02,17.38 134.83,17.19 Y4.3 133.59,17.19 132.44,18.34 132.44,20.32 132.57,20.45 133.86,20.45 134.46,21.05 134.46,21.8 IC3.33
N$34
  Bottom 0.152: IC3.34 134.06,21.1 133.71,20.75 130.54,20.75 130.08,20.3 Y4.1 131.8,19.49 132.06,19.23 132.06,17.96 132.57,17.45 132.57,16.43 132.69,16.31 135.32,16.31 C12.2
N$41
  Bottom 0.203: C8.1 46.88,33.17 IC4.6
N$44
  Bottom 0.152: C23.1 66.02,13.86 66.02,16.94 66.66,17.58 IC5.6
N$47
  Bottom 0.152: IC6.6 111.87,5.17 C24.1
N$51
  Top 0.254: R10.1 D7.C
N$52
  Top 0.254: D8.C R11.1
N$53
  Top 0.254: D9.C R12.1
N$56
  Top 0.254: D11.C 80.24,4.15 R14.1
N$57
  Top 0.254: D12.C 83.04,3.57 R15.1
N$58
  Top 0.254: D13.C 85.83,3.99 86.34,3.48 R16.1
N$61
  Top 0.152: D15.C R18.1
N$62
  Top 0.152: D16.C R19.1
N$63
  Top 0.203: D17.C R20.1
RST1
  Bottom 0.152: 50.58,19.23 49.87,19.94 49.31,19.94
  Bottom 0.203: 47.97,18.43 49.31,19.94 S2.1 | 50.58,19.23 57.89,19.23 60.05,21.39 62.46,21.39 63.23,22.15 63.23,38.79 65.51,41.07 JP1.25
  Bottom 0.254: IC1.30 36.49,21.58 36.82,21.26 39.6,21.26 40.2,20.66 R7.1 42.02,18.43 47.97,18.43
RST2  (via drill 0.35)
  Top 0.152: v79.23,23.67 78.97,23.67 78.09,24.56 64.5,24.56 63.73,25.32 63.73,30.66 66.27,33.2 67.8,33.2 68.56,33.96 68.56,38.28 68.05,38.79 v68.05,39.55
  Bottom 0.152: R8.1 86.94,9.83 84.56,9.83 83.48,10.91 IC2.30 83.48,16.75 81.77,18.47 81.77,21.77 81.26,22.28 79.74,22.28 79.23,22.78 v79.23,23.67 | v68.05,39.55 JP1.23 | S3.1 93.03,6.85 92.99,6.85
  Bottom 0.203: R8.1 91.44,7.8 92.99,6.85
RST3  (via drill 0.35)
  Top 0.152: JP1.5 90.4,43.36 89.64,44.12 89.64,47.42 91.29,49.07 116.19,49.07 v117.07,48.18
  Bottom 0.152: 137.66,20.24 R9.1 138.66,20.24 139.18,20.76 139.18,22.06 | IC3.30 136.06,23.23 136.12,23.29 138.66,23.29 139.17,22.78 139.17,22.06 | 143.25,22.06 143.53,22.06 144.35,22.88 144.35,34.21 144.25,34.31 144.25,42.6 143.49,43.36 143.49,46.91 142.22,48.18 v117.07,48.18
  Bottom 0.203: 143.25,22.06 139.17,22.06 139.18,22.06 S4.1
RX1  (via drill 0.35)
  Top 0.203: v43.67,35.99 55.35,35.99 58.15,38.79 58.15,45.9 59.92,47.68 85.07,47.68 85.83,46.91 JP1.10
  Bottom 0.203: IC1.2 43.58,35.9 v43.67,35.99
RX2
  Bottom 0.152: IC2.2 88.54,25.74 88.88,26.09 88.88,27.1 88.37,27.61 87.61,27.61 87.1,28.12 87.1,40.82 86.09,41.83 85.32,41.83 84.56,42.6 84.56,44.88 83.55,45.9 JP1.12
RX3
  Bottom 0.152: JP1.1 97.26,43.36 98.02,42.6 107.42,42.6 111.99,38.02 124.44,38.02 125.96,36.5 125.96,34.47 126.22,34.21 132.31,34.21 132.69,34.59 134.6,34.59 135.4,35.4 IC3.2
S11  (via drill 0.35)
  Top 0.254: v49.64,37.52 49.84,37.72 MIC3.P$2
  Bottom 0.152: IC1.1 41.67,36.4 42.02,36.75 49.38,36.75 49.64,37.01 v49.64,37.52
S12  (via drill 0.35)
  Top 0.203: MIC6.P$2 66.6,26.26 67.04,25.83 v77.96,25.83
  Bottom 0.152: 87.44,26.2 87.39,26.15 86.64,26.15 86.32,25.83 85.32,25.83 85.29,25.86 83.3,25.86 82.69,26.47 78.59,26.47 v77.96,25.83
  Bottom 0.254: 87.44,26.2 IC2.1
S13  (via drill 0.35)
  Top 0.203: MIC7.P$2 113.09,36.42 114.28,35.23 v126.73,35.23
  Bottom 0.152: IC3.1 135.01,35.9 134.09,34.98 129.01,34.98 128.56,34.52 126.98,34.52 126.73,34.77 v126.73,35.23
S21  (via drill 0.35)
  Top 0.254: v54.84,37.01 54.95,37.11 MIC3.P$5
  Bottom 0.254: IC1.5 43.86,34.4 44.68,35.23 52.05,35.23 53.83,37.01 v54.84,37.01
S22  (via drill 0.35)
  Top 0.203: 71.71,27.51 72.37,26.85 78.76,26.85 78.87,26.74 78.87,25.43 v78.97,25.32
  Top 0.254: MIC6.P$5 71.71,27.51
  Bottom 0.203: IC2.5 86.66,24.24 85.58,25.32 83.17,25.32 82.53,25.96 79.61,25.96 v78.97,25.32
S23  (via drill 0.35)
  Top 0.203: MIC7.P$5 118.19,37.16 119.36,35.99 128.25,35.99 128.5,35.74 128.5,35.23 129.27,34.47 135.74,34.47 v136,34.21
  Bottom 0.152: v136,34.21 138.54,34.21 138.85,33.9 IC3.5
S31  (via drill 0.35)
  Top 0.203: 37.32,39.78 37.32,38.79 36.56,38.02 36.56,36.55 37.04,36.07 37.04,34.49 v37.32,34.21
  Top 0.254: MIC2.P$2 37.32,39.78
  Bottom 0.203: v37.32,34.21 38.33,33.2 38.33,30.15 39.08,29.4 IC1.15
S32  (via drill 0.35)
  Top 0.203: MIC5.P$2 79.3,26.01 v79.99,25.32
  Bottom 0.203: 85.58,19.74 85.58,24.05 84.69,24.94 82.91,24.94 82.53,25.32 v79.99,25.32
  Bottom 0.254: IC2.15 86.07,19.24 85.58,19.74
S33  (via drill 0.35)
  Top 0.152: MIC8.P$2 125.79,36.93 126.22,36.5 129.27,36.5 130.03,35.74 130.03,35.48 130.28,35.23 136.12,35.23 136.76,34.59 136.76,34.09 136.28,33.61 v135.23,33.61
  Bottom 0.152: IC3.15 138.39,28.9 137.47,29.82 137.47,33.12 136.98,33.61 v135.23,33.61
S41  (via drill 0.35)
  Top 0.152: MIC2.P$5 42.5,38.63 41.13,37.26 41.13,34.47 41.64,33.96 44.18,33.96 44.56,33.58 v44.56,30.66
  Bottom 0.152: IC1.16 42.93,28.9 v44.56,30.66
  Bottom 0.203: 40.52,28.88 IC1.16
S42  (via drill 0.35)
  Top 0.254: MIC5.P$5 84.41,23.7 v84.56,23.55
  Bottom 0.254: v84.56,23.55 84.56,19.74 85.55,18.74 IC2.16
S43  (via drill 0.35)
  Top 0.152: MIC8.P$5 130.89,36.65 131.81,35.74 136.63,35.74 137.39,34.98 137.39,33.86 v136.35,32.94
  Bottom 0.152: v136.35,32.94 136.35,29.67 137.65,28.37 140.04,28.37
  Bottom 0.254: 140.04,28.37 IC3.16
S51  (via drill 0.35)
  Top 0.254: v33,31.67 33,36.5 32.24,37.26 26.65,37.26 25.46,38.46 MIC1.P$2
  Bottom 0.254: IC1.17 37.79,28.4 34.52,31.67 v33,31.67
S52  (via drill 0.35)
  Top 0.152: MIC4.P$2 92.77,25.4 v92.18,24.82
  Bottom 0.152: v92.18,24.82 92.18,19.48 91.42,18.72 88.88,18.72 88.4,18.24 IC2.17
S53  (via drill 0.35)
  Top 0.152: v135.42,32.64 135.72,32.34 136.61,32.34 136.71,32.44 137.77,32.44 137.98,32.64 MIC9.P$2
  Bottom 0.152: IC3.17 137.62,27.9 135.11,30.4 135.11,32.32 v135.42,32.64
S61  (via drill 0.35)
  Top 0.254: MIC1.P$5 30.56,38.43 31.22,37.77 32.75,37.77 33.74,36.78 v33.74,30.4
  Bottom 0.254: IC1.18 37.53,27.9 35.29,30.15 33.99,30.15 v33.74,30.4
S62  (via drill 0.35)
  Top 0.152: MIC4.P$5 97.87,24.66 v97.01,23.8
  Bottom 0.152: IC2.18 88.41,17.74 88.88,18.21 95.74,18.21 96.75,19.23
  Bottom 0.254: 96.75,19.23 96.75,23.55 v97.01,23.8
S63  (via drill 0.35)
  Top 0.254: MIC9.P$5 143.08,34.62 v143.74,33.96
  Bottom 0.203: v143.74,33.96 143.74,28.12 143.02,27.4 IC3.18
SS1
  Bottom 0.152: IC1.19 43.21,27.4 45.45,29.64 54.08,29.64 58.15,33.71 58.15,44.88 59.16,45.9 JP1.30
SS2  (via drill 0.35, 0.35 pad 0.7)
  Top 0.152: v89.11,17.45 88.6,17.45 86.09,19.97 86.09,22.56 85.32,23.32 85.32,30.4 v85.07,30.66
  Bottom 0.152: IC2.19 88.91,17.24 v89.11,17.45
  Bottom 0.203: JP1.19 73.13,41.07 75.93,38.28 83.8,38.28 84.56,37.52 84.56,32.94 85.07,32.18 v85.07,30.66
SS3
  Bottom 0.152: JP1.17 76.18,43.36 76.94,44.12 76.94,46.91 77.7,47.68 93.45,47.68 94.72,46.41 94.72,42.6 95.23,42.09 106.91,42.09 111.49,37.52 124.44,37.52 125.46,36.5 125.46,34.47 126.22,33.71 133.08,33.71 134.73,32.44 134.73,30.15 137.35,27.53 138.49,27.53 139.12,26.9 IC3.19
TX1  (via drill 0.35)
  Top 0.152: JP1.11 82.78,43.36 82.28,43.87 82.28,46.41 81.51,47.17 62.72,47.17 61.7,46.15 61.7,45.39 60.94,44.63 59.42,44.63 58.91,44.12 58.91,40.44 58.91,38.53 55.86,35.48 44.4,35.48 43.98,35.06 v43.16,35.06
  Bottom 0.254: IC1.3 42.82,35.4 v43.16,35.06
TX2
  Bottom 0.152: IC2.3 89.05,25.24 89.64,25.83 89.64,27.36 88.88,28.12 88.37,28.12 87.61,28.88 87.61,41.58 87.48,41.71 JP1.9
TX3  (via drill 0.35)
  Top 0.152: v105.14,41.33 105.64,40.82 105.64,38.15 106.15,37.64 107.55,37.64 108.06,37.14 108.06,36.63 108.44,36.25 112.38,36.25 114.66,33.96 133.33,33.96 133.58,33.71 v134.09,33.71
  Bottom 0.152: IC3.3 135.54,34.9 134.35,33.71 v134.09,33.71 | v105.14,41.33 104.88,41.58 94.72,41.58 93.45,42.85 JP1.3